# Altium PCB Rhino_panel.PcbDoc
Units mm, origin at the board's own origin, x right, y up, seen from the top; angles counter-clockwise.
Board outline 134.5 x 98.5 mm, 2 copper layers (Top Layer, Bottom Layer); 6 components, 0 nets, 6 pads, 0 vias.
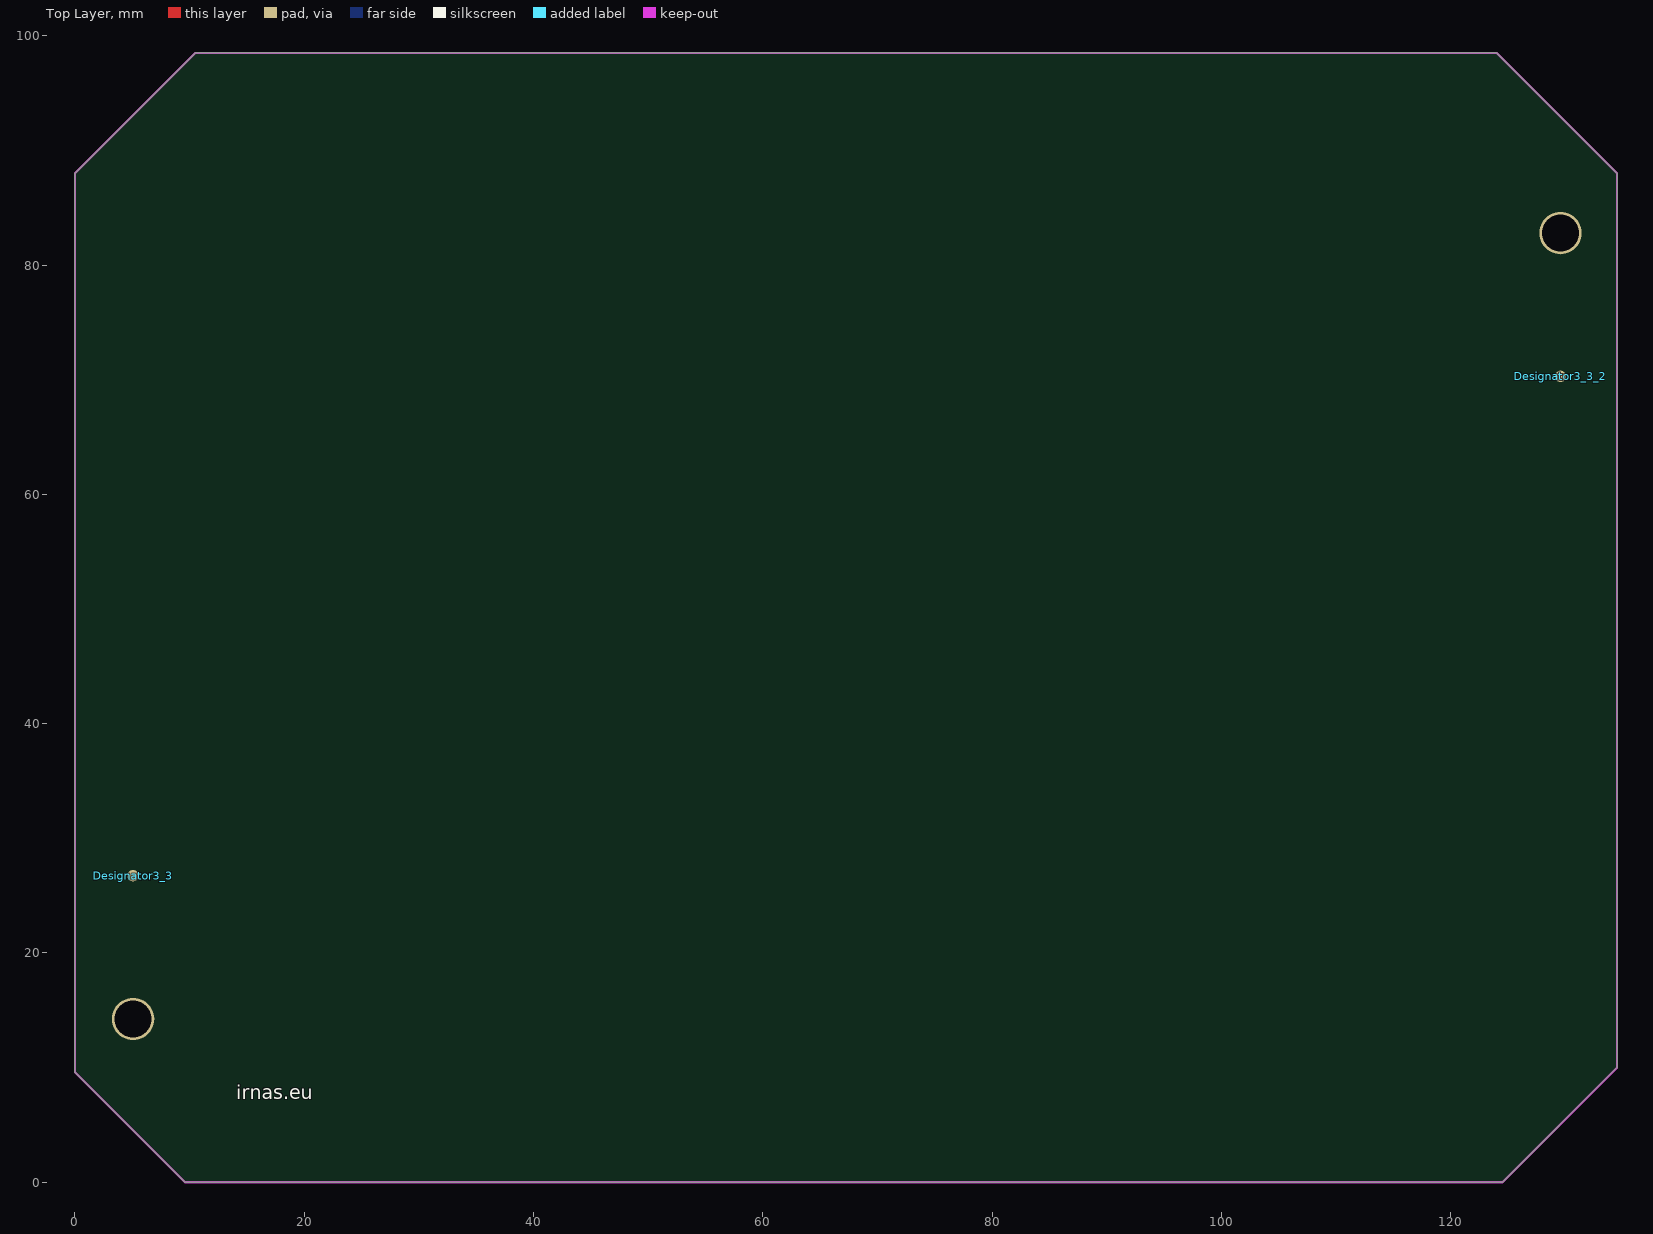
[diagram p0: Top Layer view]
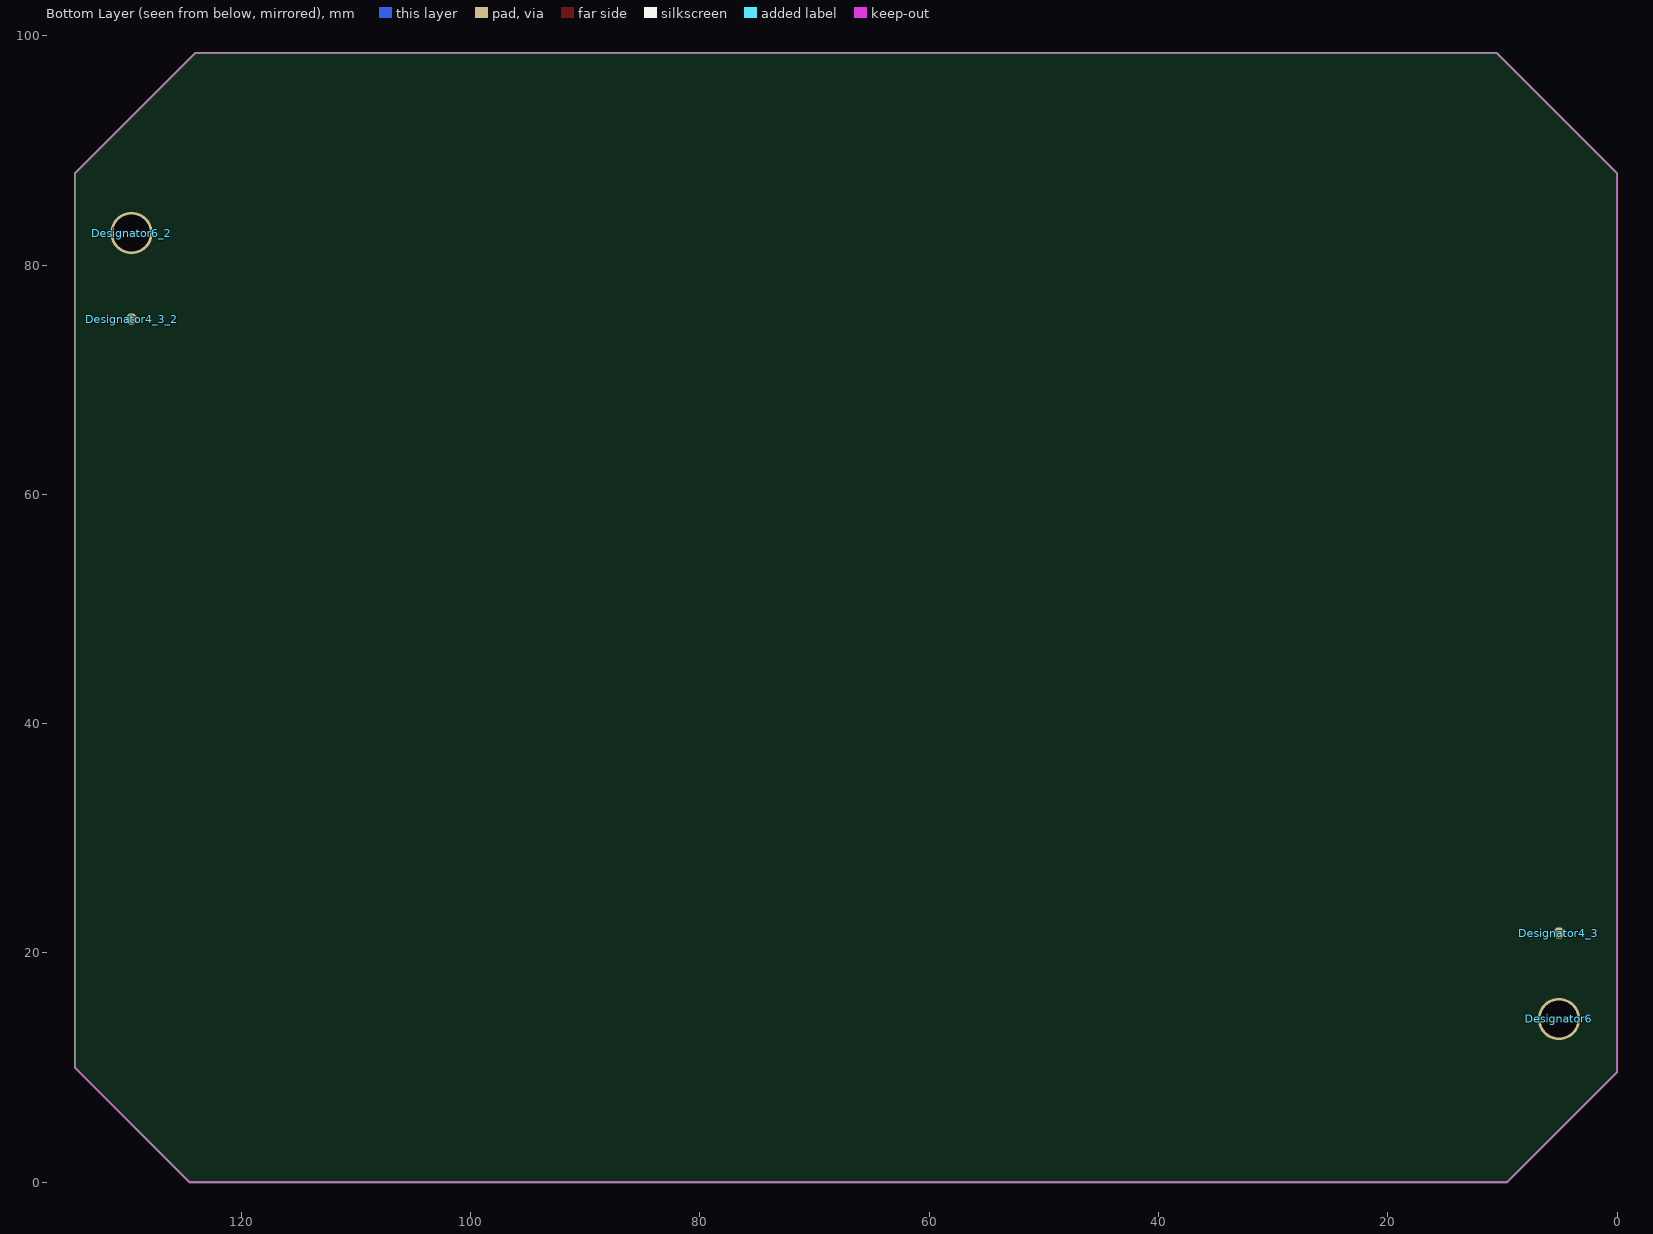
[diagram p1: Bottom Layer view, seen from below]

## Layer stack, top to bottom
Top Solder: solder mask 0.0102, Solder Resist, Dk 3.5
Top Layer: signal copper 0.0356
Dielectric 1: dielectric 0.32, FR-4, Dk 4.8
Bottom Layer: signal copper 0.0356
Bottom Solder: solder mask 0.0102, Solder Resist, Dk 3.5

## Board outline
0,9.59 9.59,0 124.5,0 134.5,10 134.5,88 124,98.5 10.5,98.5 0,88

## Design rules (kind name [scope] priority, off if disabled: settings)
Clearance [All] p1: gap=0.254 ignorepadtopadclearanceinfootprint=FALSE except(0: Arc-Hole Track-Hole SMDPad-Hole THPad-Hole Via-Hole Fill-Hole Poly-Hole Region-Hole Text-Hole)
PolygonConnect [All] p1: connectstyle=Relief reliefconductorwidth=0.254 reliefentries=4 polygonreliefangle="90 Angle" airgapwidth=0.254
RoutingVias [All] p1: holewidth=0.711 width=1.27 viastyle="Through Hole" minholewidth=0.711 minwidth=1.27 maxholewidth=0.711 maxwidth=1.27
SolderMaskExpansion [All] p1: expansion=0.102
Width [All] p1: maxlimit=0.254 minlimit=0.254 preferedwidth=0.254
30 further rules are at their usual default settings.

## Components (designator, comment, footprint, x,y, rotation, side; value= is the part's Value field where it differs from the comment)
Designator3_3 "Comment" FIDUCIAL 5.067,26.742 r270 top
Designator3_3_2 "Comment" FIDUCIAL 129.567,70.292 r90 top
Designator4_3 "Comment" FIDUCIAL 5.067,21.742 r90 bottom
Designator4_3_2 "Comment" FIDUCIAL 129.567,75.292 r270 bottom
Designator6 "Comment" HOLE 5.067,14.242 r90 bottom
Designator6_2 "Comment" HOLE 129.567,82.792 r270 bottom

## Footprints (in the part's own frame and the unit in brackets; to place one, negate y for a bottom-side part, rotate by r counter-clockwise, add the part's x,y. Pads: shape width x height; smd on the part's side, far side on the other; paste and mask are expansions set on the pad)
FIDUCIAL [mm]
  round 1 smd paste+0 mask+0.5: ""(0,0)
HOLE [mm]
  round 3.7 hole 3.2 unplated paste+0 mask+0: ""(0,0)

## Nets (pads, with @x,y where several pads share a name; then routed paths per layer and width w, separated by ;. In a path a pad name is that pad's centre, name@x,y a point inside that pad or via, vN(x,y) a via of type N, cw(c..) or ccw(c..) an arc to the next point about the centre after c; other vN are vias at no path point)
pads on no net: Designator3_3. Designator3_3_2. Designator4_3. Designator4_3_2. Designator6. Designator6_2.

## Keep-outs
Keep-Out Layer:
  the board outline again, w0.2

## Silkscreen, mask and mechanical layers (free items; w line width, h text height)
Top Overlay:
  text "irnas.eu" at 14.067,7.242 h1.2

## Dimensions
0,88 to 134.5,88 on Mechanical 1
124,98.5 to 124.5,0 on Mechanical 1

## Panel: embedded boards
"06_LORA_ANT\02_PCB\LORA_PCB.PcbDoc" at 99,12, 3 rows x 1 columns, spacing 27 x 96.971, rotation 0
"05_MCU_LORA\02_PCB\MCU_LORA.PcbDoc" at 70,12, 3 rows x 1 columns, spacing 27 x 96.971, rotation 0
"03_POWER\02_PCB\POWER.PcbDoc" at 41,12, 3 rows x 1 columns, spacing 27 x 96.971, rotation 0
"01_GPS\02_PCB\GPS.PcbDoc" at 12,12, 3 rows x 1 columns, spacing 27 x 96.971, rotation 0